# Altium PCB Serqet_FS_U_01.PcbDoc
Units mm, origin at the board's own origin, x right, y up, seen from the top; angles counter-clockwise.
Board outline 44 x 44 mm, 2 copper layers (Top Layer, Bottom Layer), stack 1.571 mm thick; 24 components, 18 nets, 87 pads, 18 vias.
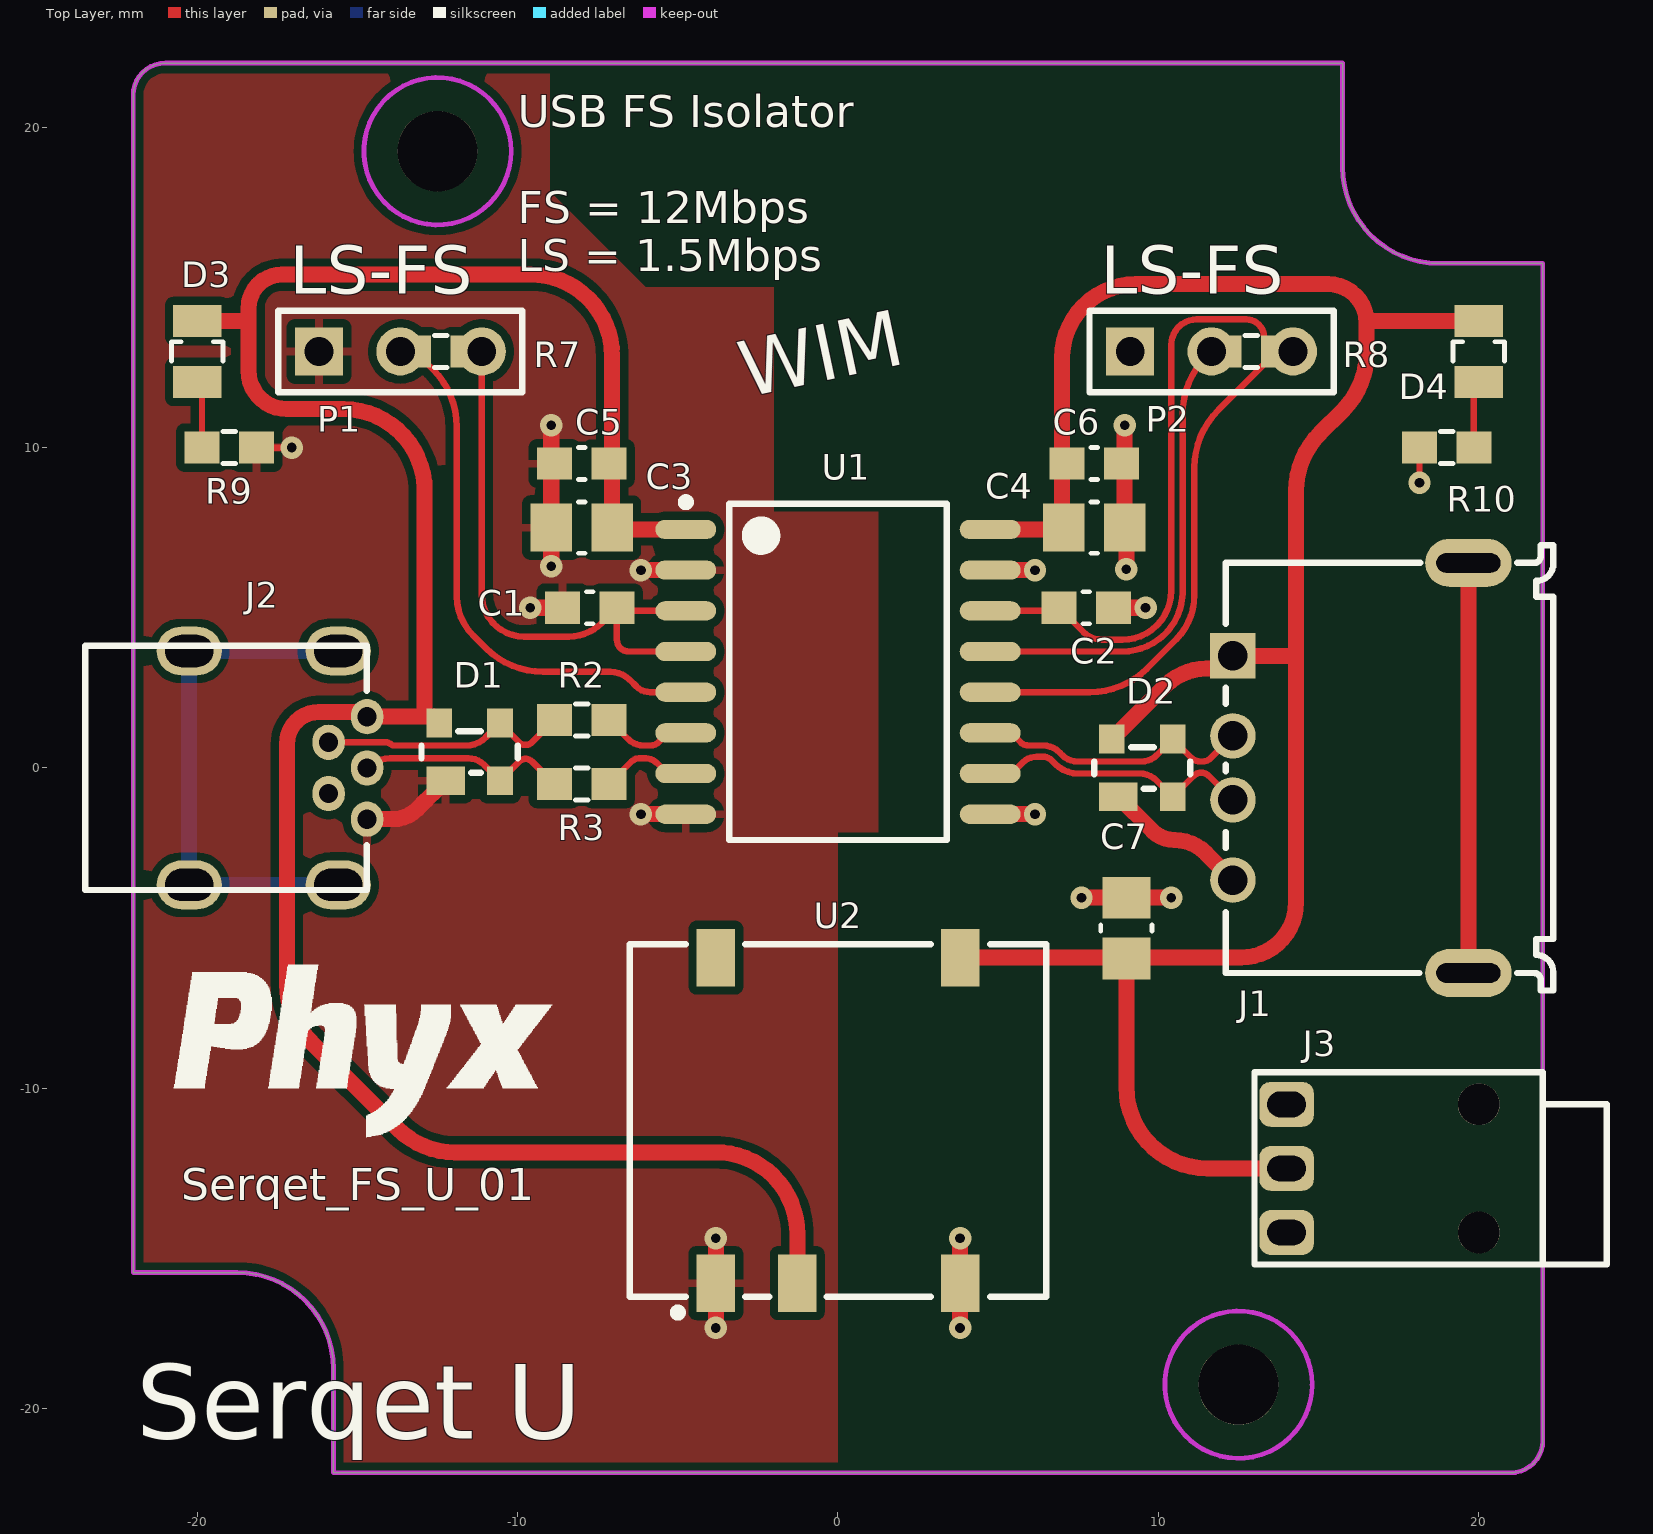
[diagram p0: Top Layer view]
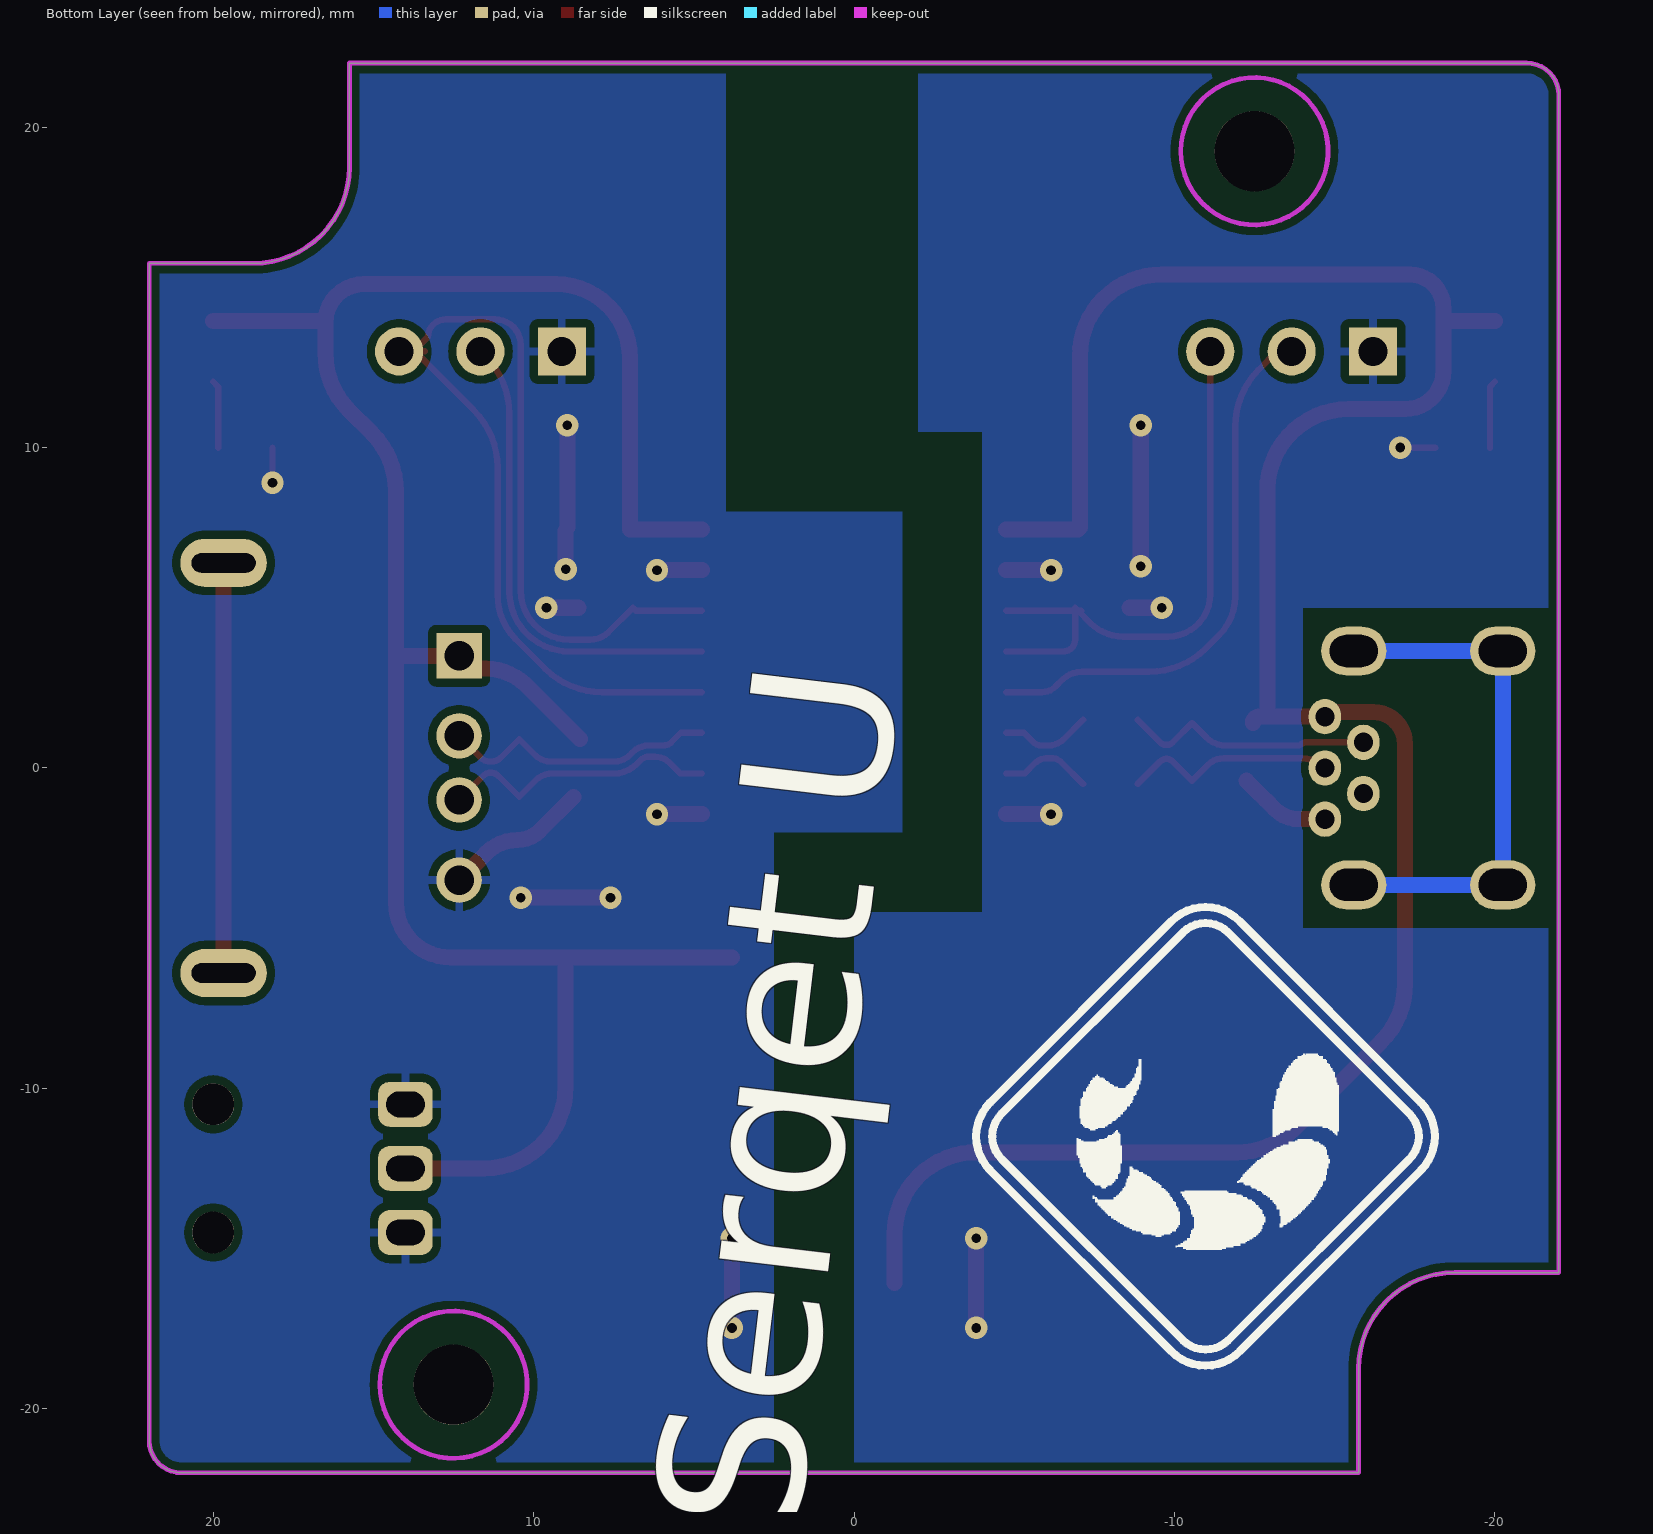
[diagram p1: Bottom Layer view, seen from below]
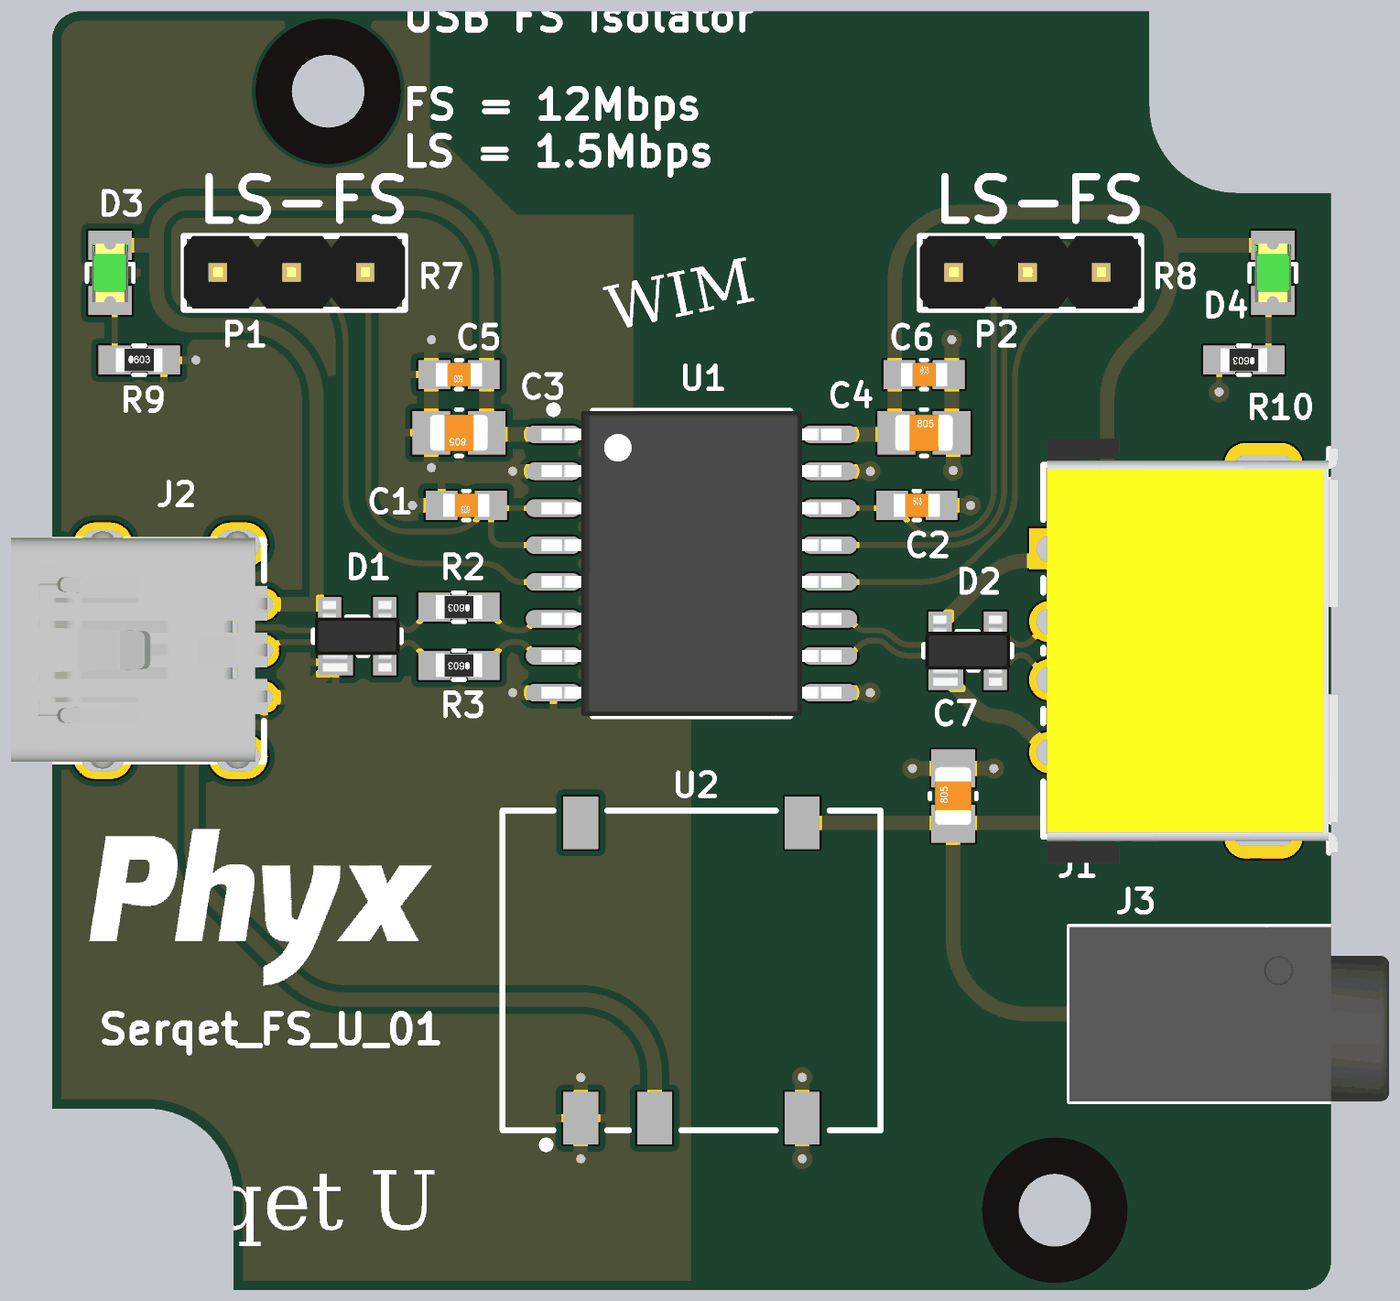
[diagram p2: 3D render of the assembled board from above, using the file's embedded part models]

## Layer stack, top to bottom
Top Solder: solder mask 0.0102, Solder Resist, Dk 3.5
Top Layer: signal copper 0.0356
Dielectric1: dielectric 1.5, FR-4, Dk 4.8
Bottom Layer: signal copper 0.0356
Bottom Solder: solder mask 0.0102, Solder Resist, Dk 3.5

## Board outline
-22,-15.75 -18.75,-15.75 cw(c-18.75,-18.75) -15.75,-18.75 -15.75,-22 21,-22 ccw(c21,-21) 22,-21 22,15.75 18.75,15.75 cw(c18.75,18.75) 15.75,18.75 15.75,22 -21,22 ccw(c-21,21) -22,21

## Design rules (kind name [scope] priority, off if disabled: settings)
Clearance [All] p1: gap=0.15 ignorepadtopadclearanceinfootprint=FALSE except(0: Arc-Hole Track-Hole SMDPad-Hole THPad-Hole Via-Hole Fill-Hole Poly-Hole Region-Hole Text-Hole; 0.25: Arc-Poly Track-Poly SMDPad-Poly THPad-Poly Via-Poly Fill-Poly Poly-Poly)
HoleSize [All] p1: absolutevalues=TRUE maxlimit=4 minlimit=0.025 maxpercent=80.000 minpercent=20.000
MinimumSolderMaskSliver [All] p1: minsoldermaskwidth=0.1
PolygonConnect PolygonConnect_Via [IsVia] p1: connectstyle=Direct reliefconductorwidth=0.254 reliefentries=4 polygonreliefangle="90 Angle" airgapwidth=0.254
PolygonConnect [All] p2: connectstyle=Relief reliefconductorwidth=0.254 reliefentries=4 polygonreliefangle="90 Angle" airgapwidth=0.254
RoutingVias [All] p1: holewidth=0.3 width=0.7 viastyle="Through Hole" minholewidth=0.3 minwidth=0.7 maxholewidth=0.3 maxwidth=0.7
SilkToSolderMaskClearance SilkscreenOverComponentPads [IsPad] p1: minsilkscreentomaskgap=0.254 clearancetoexposedcopper=TRUE
SolderMaskExpansion [All] p1: expansion=0.075
Width [All] p1: maxlimit=2 minlimit=0.2 preferedwidth=0.5 minimp=50.000000 maximp=50.000000 favimp=50.000000
27 further rules are at their usual default settings.

## Classes and differential pairs
net class 90r: USB.D_N USB.D_P
net class POWER: GND GND_ISO VDD1 VDD2 VUSB VUSB_ISO

## Components (designator, comment, footprint, x,y, rotation, side; value= is the part's Value field where it differs from the comment)
C1 "CAP_CERAMIC" C0603_N -7.75,5 r180 top value=100nF
C2 "CAP_CERAMIC" C0603_N 7.75,5 r0 top value=100nF
C3 "CAP_CERAMIC" C0805_N -8,7.5 r180 top value="10uF 10V"
C4 "CAP_CERAMIC" C0805_N 8,7.5 r0 top value="10uF 10V"
C5 "CAP_CERAMIC" C0603_N -8,9.5 r180 top value=100nF
C6 "CAP_CERAMIC" C0603_N 8,9.5 r0 top value=100nF
C7 "CAP_CERAMIC" C0805_N 9,-5 r90 top value="10uF 10V"
D1 "Low Capacitanse TVS Diode array" SOT-143 -11.5,0.5 r0 top value=YSSR05
D2 "Low Capacitanse TVS Diode array" SOT-143 9.5,0 r0 top value=YSSR05
D3 "Default 0805 Green LED" LED_0805_GR -20,13 r270 top
D4 "Default 0805 Green LED" LED_0805_GR 20,13 r270 top
J1 "USB type A Short horizontal connector" WE_614104150121 16,0 r90 top value=614104150121
J2 "THT USB Mini-B Receptacle" USB_Mini-B_THT -17.5,0 r90 top value=651005136521
J3 "Socket RA 3.5 with 1.35 barrel" DC-003 14,-12.5 r180 top value=DC-003
P1 "Header 3" HDR1X3 -16.2,13 r0 top
P2 "Header 3" HDR1X3 9.12,13 r0 top
R2 "RESISTOR" R0603_N -8,1.5 r180 top value=22R
R3 "RESISTOR" R0603_N -8,-0.5 r180 top value=22R
R7 "RESISTOR" R0603_N -12.4,13 r180 top value=0R
R8 "RESISTOR" R0603_N 12.9,13 r180 top value=0R
R9 "RESISTOR" R0603_N -19,10 r0 top value=220R
R10 "RESISTOR" R0603_N 19,10 r180 top value=220R
U1 "USB FS 12Mbps isolator 2,5kV" SOIC_W_16 0,3 r0 top value=ADuM3160BRWZ
U2 "Isolated DC-DC module 1kV 5V 1W" R1SE-0505-R 0,-11 r90 top value=R1SE-0505-R

## Footprints (in the part's own frame and the unit in brackets; to place one, negate y for a bottom-side part, rotate by r counter-clockwise, add the part's x,y. Pads: shape width x height; smd on the part's side, far side on the other; paste and mask are expansions set on the pad)
C0603_N [mm] "Low density"
  rect 1.1x1 smd: 1(-0.85,0) 2(0.85,0)
  silkscreen extent -0.1,-0.5 0.1,0.5, body extent -0.8,-0.4 0.8,0.4, height 0.3
C0805_N [mm] "Low density"
  rect 1.3x1.5 smd: 1(-0.95,0) 2(0.95,0)
  silkscreen extent -0.1,-0.8 0.1,0.8, body extent -1,-0.62 1,0.63, height 0.78
DC-003 [mm] "CUI PJ-040CH"
  rrect50% 1.7x1.4 hole 0.8 slot 1.2 at 0 deg paste-5: 1(0,0) 2(0,-2) 3(0,2)
  round 1.3 hole 1.3 unplated paste-5: MH1(-6,-2) MH2(-6,2)
  silkscreen extent -10,-3 1,3, body extent -10,-3 1,3, height 5
HDR1X3 [mm] "Connector; Header; 3 Position"
  rect 1.5x1.5 hole 0.9: 1(0,0)
  round 1.5 hole 0.9: 2(2.54,0) 3(5.08,0)
  silkscreen extent -1.27,-1.27 6.35,1.27, body extent -1.27,-1.23 6.35,1.27, height 8.2
LED_0805_GR [mm] "0805 LED GREEN"
  rect 1x1.5 smd: 1(-0.95,0) 2(0.95,0)
  silkscreen extent -0.3,-0.8 0.3,0.8, body extent -1.01,-0.62 1.01,0.63, height 1.1
R1SE-0505-R [mm] "R1SE-0505-R"
  rect 1.8x1.2 smd: 1(-5.08,3.81) 2(-5.08,1.27) 4(-5.08,-3.81) 5(5.08,-3.81) 8(5.08,3.81)
  silkscreen extent -6.12,-6.5 5.5,6.5, body extent -5.35,-6.37 5.35,6.38, height 7
R0603_N [mm] "Low density"
  rect 1.1x1 smd: 1(-0.85,0) 2(0.85,0)
  silkscreen extent -0.2,-0.5 0.2,0.5, body extent -0.8,-0.41 0.8,0.41, height 0.45
SOIC_W_16 [mm] "SOIC, 16-Leads, Body 10,30x7,50mm, Pitch 1,27mm, IPC Medium Density"
  oval 1.9x0.6 smd: 1(-4.75,4.445) 2(-4.75,3.175) 3(-4.75,1.905) 4(-4.75,0.635) 5(-4.75,-0.635) 6(-4.75,-1.905) 7(-4.75,-3.175) 8(-4.75,-4.445) 9(4.75,-4.445) 10(4.75,-3.175) 11(4.75,-1.905) 12(4.75,-0.635) 13(4.75,0.635) 14(4.75,1.905) 15(4.75,3.175) 16(4.75,4.445)
  silkscreen extent -4.87,-5.25 3.4,5.42, body extent -5.16,-5.25 5.16,5.25, height 2.65
SOT-143 [mm] "SOT-143"
  rect 1.2x0.9 smd: 1(-0.75,-0.9)
  rect 0.8x0.9 smd: 2(0.95,-0.9) 3(0.95,0.9) 4(-0.95,0.9)
  silkscreen extent -1.5,-0.65 1.5,0.65, body extent -1.46,-1.21 1.46,1.21, height 1
USB_Mini-B_THT [mm] "USB MiniB THT"
  oval 1.1x1.016 hole 0.6: 1(1.6,-2.8) 2(0.8,-1.6) 3(0,-2.8) 4(-0.8,-1.6) 5(-1.6,-2.8)
  oval 1.524x2.032 hole 1 slot 1.5 at 90 deg: MH1(-3.65,2.75) MH2(3.65,2.75) MH3(-3.65,-1.9) MH4(3.65,-1.9)
  silkscreen extent -3.81,-2.79 3.81,6, body extent -4.05,-2.91 4.1,5.91, height 3.95
WE_614104150121 [mm] "Wurth SHORT USB conn 614104150121"
  rect 1.42x1.42 hole 0.92: 1(3.5,3.675)
  round 1.42 hole 0.92: 2(1,3.675) 3(-1,3.675) 4(-3.5,3.675)
  oval 1.5x2.7 hole 0.6 slot 2 at 90 deg: MH1(-6.4,-3.675) MH2(6.4,-3.675)
  silkscreen extent -6.95,-6.33 6.95,3.9, body extent -7.3,-6.22 7.3,3.78, height 7.22

## Part data
C1 C2 C5 C6: library part "CAP # 100nF 16V 0603", "Capacitor Ceramic"
C3 C4 C7: library part "CAP # 10uF 10V 0805", "Capacitor Ceramic", Supplier Part Number 1=2320859, Supplier 1=Farnell
D1 D2: library part "TVS # YSSR05", "=Description", Supplier 1=China
D3 D4: library part "LED # Green 0805", "=Description", Supplier Part Number 1=2099239, Supplier 1=Farnell
J1: library part "USB A 614104150121 Short"
J2: library part "USB Mini-B F", Supplier Part Number 1=1841176, Supplier 1=Farnell
J3: library part "SCKT 1.35mm barrel 3.5mm dia", "=Description", Supplier 1=China
P1 P2: library part "Pin Header 2.54mm 3way"
R2 R3: library part "RES # 22R 0603"
R7 R8: library part "RES # 0R 0603", Supplier Part Number 1=2447743, Supplier 1=Farnell
R9 R10: library part "RES # 220R 0603"
U1: library part "ISO # USB ADuM3160BRWZ", "=Description", Supplier Part Number 1=1843660, Supplier 1=Farnell
U2: library part "ISO # PWR 5V 1W 1kV R1SE-0505-R", "=Description", Supplier Part Number 1=2218601, Supplier 1=Farnell

## Free pads (board coordinates)
  round 2.5 hole 2.5 unplated mask+1.25: 0(-12.5,19.25) 0(12.5,-19.25)

## Via types
v1: diameter 0.7, hole 0.3, Top Layer to Bottom Layer, tented top, 18 vias

## Nets (pads, with @x,y where several pads share a name; then routed paths per layer and width w, separated by ;. In a path a pad name is that pad's centre, name@x,y a point inside that pad or via, vN(x,y) a via of type N, cw(c..) or ccw(c..) an arc to the next point about the centre after c; other vN are vias at no path point)
CH: J2.MH1 J2.MH2 J2.MH3 J2.MH4 | length 16.6
  Bottom Layer w0.5: J2.MH3 J2.MH1 J2.MH2 J2.MH4
CH_ISO: J1.MH1 J1.MH2 | length 12.8
  Top Layer w0.5: J1.MH1 J1.MH2
GND: C1.2 C3.2 C5.2 D1.1 J2.5 P1.1 R9.2 U1.2 U1.8 U2.1 | length 15.4
  Top Layer w0.2: R9.2 v1(-17.05,10)
  Top Layer w0.5: J2.5 -13.9,-1.6 ccw(c-13.9,-0.514) -13.132,-1.282 ; -12.85,-1 -13.132,-1.282 ; D1.1 -13.132,-1.282 ; v1@-9.6,5 C1.2 ; v1(-8.95,6.3) C3.2 v1(-8.95,10.7) ; v1(-6.15,-1.445) U1.8 ; v1(-6.15,6.175) U1.2 ; v1(-3.81,-17.48) U2.1 v1(-3.81,-14.68)
  other v1: -9.6,5
GND_ISO: C2.2 C4.2 C6.2 C7.2 D2.1 J1.4 J3.2 J3.3 P2.1 R10.2 U1.9 U1.15 U2.4 | length 19.5
  Top Layer w0.2: v1(18.15,8.9) R10.2
  Top Layer w0.5: v1(3.81,-17.48) U2.4 v1(3.81,-14.68) ; U1.9 v1(6.15,-1.445) ; U1.15 v1(6.15,6.175) ; v1(7.6,-4.05) C7.2 v1(10.4,-4.05) ; C2.2 v1(9.6,5) ; D2.1 9.817,-1.967 ccw(c10.5,-1.284) 10.5,-2.25 cw(c10.5,-3.638) 11.482,-2.657 J1.4 ; C4.2 v1(8.95,10.7) ; v1(9,6.2) C4.2@9,7.4
NetD1_2: D1.2 J2.3 R3.2 | length 6.8
  Top Layer w0.2: J2.3 cw(c-13.976,-0.724) -13.976,0.3 -11.533,0.3 cw(c-11.533,-0.383) -11.05,0.1 D1.2 -9.95,0.2 ; -9.95,0.2 cw(c-9.75,0) -9.55,0.2 R3.2
NetD1_3: D1.3 J2.2 R2.2 | length 7.9
  Top Layer w0.2: J2.2 -14.141,0.8 cw(c-14.141,0.459) -13.9,0.7 -11.604,0.7 ccw(c-11.604,1.554) -11,0.95 D1.3 -9.95,0.8 ccw(c-9.75,1) -9.55,0.8 R2.2
NetD3_2: D3.2 R9.1 | length 2.1
  Top Layer w0.2: D3.2 -19.85,11.9 R9.1
NetD4_2: D4.2 R10.1 | length 2.1
  Top Layer w0.2: R10.1 19.85,11.9 D4.2
SDPU: P1.2 R7.2 U1.5 | length 16.7
  Top Layer w0.2: R7.2 cw(c-13.25,12.879) -13.164,12.964 -12.644,12.444 cw(c-14.44,10.648) -11.9,10.648 -11.9,5.357 ccw(c-10.193,5.357) -11.4,4.15 -10.994,3.744 ccw(c-9.198,5.54) -9.198,3 -7.104,3 cw(c-7.104,2.146) -6.5,2.75 -6.292,2.542 ccw(c-5.865,2.969) -5.865,2.365 U1.5
SPD: P2.2 R8.2 U1.13 | length 14.8
  Top Layer w0.2: U1.13 8.873,3.635 ccw(c8.873,5.529) 10.027,4.027 ccw(c8.873,5.529) 10.212,4.19 ccw(c8.898,5.504) 10.373,4.373 ccw(c8.898,5.504) 10.75,5.345 ccw(c8.898,5.504) 10.757,5.504 10.757,11.045 cw(c13.297,11.045) 11.501,12.841 P2.2
USB.D_N: R2.1 U1.6 | length 2.9
  Top Layer w0.2: R2.1 -6.55,0.9 ; -6.55,0.9 ccw(c-6.067,1.383) -6.067,0.7 -5.841,0.7 ccw(c-5.841,1.041) -5.6,0.8 -5.305,1.095 U1.6
USB.D_P: R3.1 U1.7 | length 2.9
  Top Layer w0.2: R3.1 -6.456,0.194 cw(c-6.2,-0.062) -6.2,0.3 -6,0.3 cw(c-6,-0.183) -5.659,0.159 -5.325,-0.175 U1.7
USB_ISO.D_N: D2.3 J1.2 U1.11 | length 8.7
  Top Layer w0.2: U1.11 5.405,1.095 5.7,0.8 ccw(c5.941,1.041) 5.941,0.7 6.4,0.7 cw(c6.4,-0.024) 6.912,0.488 7,0.4 ccw(c7.483,0.883) 7.483,0.2 9.467,0.2 ccw(c9.467,0.883) 9.95,0.4 ; 9.95,0.4 D2.3 11.043,0.307 ccw(c11.299,0.563) 11.299,0.201 11.386,0.201 ccw(c11.386,0.539) 11.625,0.3 J1.2
USB_ISO.D_P: D2.2 J1.3 U1.10 | length 8.8
  Top Layer w0.2: U1.10 5.425,-0.175 5.773,0.173 ; 5.774,0.174 cw(c6.2,-0.254) 6.2,0.35 6.4,0.35 cw(c6.4,-0.024) 6.664,0.241 ; 6.665,0.24 6.783,0.122 ccw(c7.5,0.839) 7.5,-0.175 9.407,-0.175 cw(c9.407,-0.943) 9.95,-0.4 D2.2 11.103,-0.247 cw(c11.338,-0.482) 11.338,-0.15 cw(c11.338,-0.482) 11.572,-0.247 ; 11.572,-0.247 J1.3
VDD1: C1.1 P1.3 R7.1 U1.3 U1.4 | length 18.6
  Top Layer w0.2: P1.3 -11.12,5.42 ccw(c-9.8,5.42) -9.8,4.1 -8.4,4.1 ccw(c-8.4,5.549) -7.742,4.258 ccw(c-8.4,5.549) -7.376,4.524 C1.1@-6.995,4.905 ; C1.1@-7.095,4.905 C1.1@-6.995,4.905 ; U1.4 -6.535,3.635 cw(c-6.535,4) -6.9,4 C1.1@-6.9,4.905 ; U1.3 C1.1@-6.9,4.905 ; C1.1@-6.995,4.905 C1.1@-6.9,4.905 ; C1.1@-6.995,4.905 C1.1 C1.1@-6.9,4.905
VDD2: C2.1 P2.3 R8.1 U1.12 U1.14 | length 35.8
  Top Layer w0.2: U1.12 7.857,2.365 ccw(c7.857,4.905) 9.652,3.108 ccw(c7.857,4.905) 9.654,3.109 10.547,4.002 ccw(c9.15,5.4) 11.126,5.4 11.126,9.374 cw(c13.666,9.374) 11.87,11.17 13.665,12.965 cw(c13.75,12.879) R8.1 ; U1.14 6.805,4.905 C2.1 7.652,4.248 ccw(c8.25,4.845) 8.25,4 8.872,4 ccw(c8.872,5.528) 9.952,4.447 ; 9.953,4.448 ccw(c8.872,5.528) 10.4,5.528 10.4,13.2 cw(c11.2,13.2) 10.435,13.435 cw(c11.2,13.2) 10.965,13.965 cw(c11.2,13.2) 11.2,14 12.75,14 cw(c12.75,13.45) 13.3,13.45 R8.1 ; R8.1@13.4,13 R8.1
VUSB: C3.1 C5.1 D1.4 D3.1 J2.1 U1.1 U2.2 | length 73.8
  Top Layer w0.5: D3.1 -18.45,13.95 -18.4,14 ; D1.4 ccw(c-12.65,1.4) -12.65,1.6 -12.9,1.6 ; C3.1 -7.05,12.86 ccw(c-9.59,12.86) -7.342,14.042 ccw(c-9.59,12.86) -8.408,15.108 ccw(c-9.59,12.86) -9.59,15.4 -17.35,15.4 ccw(c-17.35,14.35) -17.803,15.297 ccw(c-17.35,14.35) -18.297,14.803 ccw(c-17.35,14.35) -18.4,14.35 -18.4,14 ; C3.1@-6.995,7.445 U1.1 ; U2.2 -1.27,-14.54 ccw(c-3.81,-14.54) -1.31,-14.09 ccw(c-3.81,-14.54) -3.36,-12.04 ccw(c-3.81,-14.54) -3.81,-12 -11.948,-12 cw(c-11.948,-9.46) -13.744,-11.256 -16.456,-8.544 cw(c-14.66,-6.748) -17.2,-6.748 -17.2,0.75 cw(c-16.2,0.75) -16.2,1.75 -14.7,1.75 J2.1 -12.9,1.6 ; -18.4,14 -18.4,12.4 ccw(c-17.2,12.4) -18.283,11.883 ccw(c-17.2,12.4) -17.717,11.317 ccw(c-17.2,12.4) -17.2,11.2 -15.44,11.2 cw(c-15.44,8.66) -12.9,8.66 -12.9,1.6
VUSB_ISO: C4.1 C6.1 C7.1 D2.4 D4.1 J1.1 J3.1 U1.16 U2.5 | length 70.1
  Top Layer w0.5: U2.5 12.58,-5.92 ccw(c12.58,-4.2) 13.374,-5.726 ccw(c12.58,-4.2) 14.106,-4.994 ccw(c12.58,-4.2) 14.3,-4.2 14.3,3.5 ; U1.16 6.995,7.445 6.995,12.795 cw(c9.3,12.795) 9.3,15.1 15.3,15.1 cw(c15.3,13.9) 16.5,13.9 ; D2.4 10.22,2.57 cw(c11.5,1.29) 11.5,3.1 11.925,3.1 J1.1 14.3,3.5 ; C7.1 9,-9.96 ccw(c11.54,-9.96) 11.54,-12.5 J3.1 ; D4.1 16.55,13.95 16.5,13.9 ; 14.3,3.5 14.3,8.648 cw(c16.84,8.648) 15.044,10.444 15.756,11.156 ccw(c13.96,12.952) 16.5,12.952 16.5,13.9
pads on no net: J2.4 J3.MH1 J3.MH2 U2.8

## Polygon pours and split planes (outlines as drawn)
GND on Top Layer "T_GND" (solid, remove dead copper, pour order 2): 1.25,8 1.25,-2 0,-2 0,-22 -22,-22 -22,22 -9,22 -9,18 -6,15 -2,15 -2,8
GND on Bottom Layer "B_GND" (solid, remove dead copper, pour order 6): -2,22 -2,10.5 -4,10.5 -4,-4.5 0,-4.5 0,-22 -22,-22 -22,-5 -14,-5 -14,5 -22,5 -22,22
GND_ISO on Bottom Layer "B_GND_ISO" (solid, remove dead copper, pour order 4): 4,22 22,22 22,-22 2.5,-22 2.5,-2 -1.5,-2 -1.5,8 4,8

## Keep-outs
Keep-Out Layer:
  circle w0.15: c-12.5,19.25 r2.3
  circle w0.15: c12.5,-19.25 r2.3
  lines w0.15: -22,-15.75 -18.75,-15.75 cw(c-18.75,-18.75) -15.75,-18.75 -15.75,-22 21,-22 ccw(c21,-21) 22,-21 22,15.75 18.75,15.75 cw(c18.75,18.75) 15.75,18.75 15.75,22 -21,22 ccw(c-21,21) -22,21 -22,-15.75
  text ".Layer_Name" at 283.5,-45 h3.5

## Other copper
Top Layer:
  text ".Layer_Name" at 283.5,-45 h3.5
Bottom Layer:
  text ".Layer_Name" at 283.5,-45 h3.5

## Silkscreen, mask and mechanical layers (free items; w line width, h text height)
Top Overlay:
  drawing of 4 lines, arcs and shapes, not listed
  text "USB FS Isolator" at -10,20 h1
  text "FS = 12Mbps / LS = 1.5Mbps" at -10,15.5 h1
  text "LS-FS" at -17.12,14.8 h1.5
  text "LS-FS" at 8.2,14.8 h1.5
  text "WIM" at -2.75,11 h3 r12
  text "Serqet_FS_U_01" at -20.5,-13.5 h1
  text "Serqet U" at -21.9,-21.7 h4
  text ".Layer_Name" at 283.5,-45 h3.5
Bottom Overlay:
  drawing of 23 lines, arcs and shapes, not listed
  text "Serqet U" at 0,-24.25 h9.5 r276.79
  text ".Layer_Name" at 283.5,-45 h3.5
Top Paste:
  text ".Layer_Name" at 283.5,-45 h3.5
Bottom Paste:
  text ".Layer_Name" at 283.5,-45 h3.5
Top Solder:
  text ".Layer_Name" at 283.5,-45 h3.5
Bottom Solder:
  text ".Layer_Name" at 283.5,-45 h3.5
Drill Guide:
  text ".Layer_Name" at 283.5,-45 h3.5
3D Symbols:
  text ".Layer_Name" at 283.5,-45 h3.5
Outline:
  the board outline again, w0.15
Comments:
  text ".Layer_Name" at 283.5,-45 h3.5
Fabrication:
  text "All Dimensions are in mm" at -10,-38 h1
  text ".Layer_Name" at 283.5,-45 h3.5
Placebound Top:
  text ".Layer_Name" at 283.5,-45 h3.5
Placebound Bottom:
  text ".Layer_Name" at 283.5,-45 h3.5
Frame:
  drawing of 15 lines, arcs and shapes, not listed
  text "Document" at 279,-30 h2
  text ".PCB_TITLE" at 280.5,-35.5 h4
  text "Layer Name" at 279,-40 h2
  text "Date" at 279,-50 h2
  text "Rev" at 319,-50 h2
  text ".Print_Date" at 282,-55.5 h3.5
  text ".PCB_REV" at 323.5,-55.5 h4
  text "Desginer" at 229,-60 h2
  text "Document" at 279,-60 h2
  text ".Pcb_File_Name_No_Path" at 280.5,-65 h1.5
  text ".PCB_ENGINEER" at 233.5,-65.5 h4
Mechanical 11:
  circle w0.2: c-12.5,19.25 r1.25
  circle w0.2: c12.5,-19.25 r1.25
  lines w0.15: -24.5,0 -22,0 ; -22.5,-0.25 ccw(c-22.5,0.354) -22.073,-0.073 -22,0 ; -22.5,0.25 cw(c-22.5,-0.354) -22.073,0.073 -22,0 ; 22.5,-0.25 cw(c22.5,0.354) 22.073,-0.073 22,0 ; 22.5,0.25 ccw(c22.5,-0.354) 22.073,0.073 22,0 ; 24.5,0 22,0 ; -22,-15.75 -18.75,-15.75 cw(c-18.75,-18.75) -15.75,-18.75 -15.75,-22 21,-22 ccw(c21,-21) 22,-21 22,15.75 18.75,15.75 cw(c18.75,18.75) 15.75,18.75 15.75,22 -21,22 ccw(c-21,21) -22,21 -22,-15.75
  text "Micro USB" at -27,0.25 h0.5
  text "USB A" at 23,0.25 h0.5
Assembly Top:
  text ".Layer_Name" at 283.5,-45 h3.5
Assembly Bottom:
  text ".Layer_Name" at 283.5,-45 h3.5
Drill Drawing:
  text ".legend" at 42.5,-9.25 h2

## Dimensions
-22,-15.75 to 12.5,-19.25 on Drill Drawing
12.5,-19.25 to -15.75,-22 on Drill Drawing
-15.75,-22 to -21,22 on Fabrication
-22,-15.75 to 22,-21 on Fabrication

## Text inside footprints (layer, text, board x,y; h text height)
J2: Comments "PCB Edge" at -22.7,-2.5 h0.7 r90